# EAGLE board CT_schematic (EAGLE 7.6.0)

Size 100 x 80 mm. Coordinates in mm from the lower left corner, seen from the top.
Outline: 0,0 100,0 100,80 0,80 0,0
Copper layers (1*16): Top 0.035mm / dielectric 1.5mm / Bottom 0.035mm
Design rules "default": minimum track width 10mil, minimum drill 24mil, track to track 8mil, track to pad 8mil, pad to pad 8mil, via to via 8mil, smd to smd 8mil, copper to edge 40mil, drill to drill 8mil, minimum pad ring 10mil, minimum via ring 8mil, stop-mask expansion 4mil, vias tented up to drill 0mil, thermal gap 10mil

## Footprints (pad centres in the part's own frame; a part is rotated, then mirrored left to right if it is on the bottom)
C0603 = smd 0.8 x 0.8: 1 -0.762,0; 2 0.762,0
C0402 = smd 0.5 x 0.5: 1 -0.508,0; 2 0.508,0
C1210 = smd 1.2 x 2.5: 1 -1.524,0; 2 1.524,0
R0603 = smd 0.8 x 0.8: 1 -0.762,0; 2 0.762,0
EXV-9H = smd 3.505 x 1.676: 1 -2.857,0; 2 2.857,0
L0603 = smd 0.8 x 0.8: 1 -0.762,0; 2 0.762,0
IND25X25CZ = smd 2.489 x 3.429: 1 -2.718,0; 2 2.718,0
PJ-037B_PACKAGE = drill 3.7 square: 1 12,0 | drill 3.2 square: 2 6,0
LQFP100 = smd 0.3 x 1.2: 1 -6,-7.75; 2 -5.5,-7.75; 3 -5,-7.75; 4 -4.5,-7.75; 5 -4,-7.75; 6 -3.5,-7.75; 7 -3,-7.75; 8 -2.5,-7.75; 9 -2,-7.75; 10 -1.5,-7.75; 11 -1,-7.75; 12 -0.5,-7.75; 13 0,-7.75; 14 0.5,-7.75; 15 1,-7.75; 16 1.5,-7.75; 17 2,-7.75; 18 2.5,-7.75; 19 3,-7.75; 20 3.5,-7.75; 21 4,-7.75; 22 4.5,-7.75; 23 5,-7.75; 24 5.5,-7.75; 25 6,-7.75; 51 6,7.75; 52 5.5,7.75; 53 5,7.75; 54 4.5,7.75; 55 4,7.75; 56 3.5,7.75; 57 3,7.75; 58 2.5,7.75; 59 2,7.75; 60 1.5,7.75; 61 1,7.75; 62 0.5,7.75; 63 0,7.75; 64 -0.5,7.75; 65 -1,7.75; 66 -1.5,7.75; 67 -2,7.75; 68 -2.5,7.75; 69 -3,7.75; 70 -3.5,7.75; 71 -4,7.75; 72 -4.5,7.75; 73 -5,7.75; 74 -5.5,7.75; 75 -6,7.75 | smd 1.2 x 0.3: 26 7.75,-6; 27 7.75,-5.5; 28 7.75,-5; 29 7.75,-4.5; 30 7.75,-4; 31 7.75,-3.5; 32 7.75,-3; 33 7.75,-2.5; 34 7.75,-2; 35 7.75,-1.5; 36 7.75,-1; 37 7.75,-0.5; 38 7.75,0; 39 7.75,0.5; 40 7.75,1; 41 7.75,1.5; 42 7.75,2; 43 7.75,2.5; 44 7.75,3; 45 7.75,3.5; 46 7.75,4; 47 7.75,4.5; 48 7.75,5; 49 7.75,5.5; 50 7.75,6; 76 -7.75,6; 77 -7.75,5.5; 78 -7.75,5; 79 -7.75,4.5; 80 -7.75,4; 81 -7.75,3.5; 82 -7.75,3; 83 -7.75,2.5; 84 -7.75,2; 85 -7.75,1.5; 86 -7.75,1; 87 -7.75,0.5; 88 -7.75,0; 89 -7.75,-0.5; 90 -7.75,-1; 91 -7.75,-1.5; 92 -7.75,-2; 93 -7.75,-2.5; 94 -7.75,-3; 95 -7.75,-3.5; 96 -7.75,-4; 97 -7.75,-4.5; 98 -7.75,-5; 99 -7.75,-5.5; 100 -7.75,-6
TST-110-05-T-D-RA = drill 1 pad 1.7 square: 1 0,0 | drill 1 pad 1.7: 2 0,2.54; 3 2.54,0; 4 2.54,2.54; 5 5.08,0; 6 5.08,2.54; 7 7.62,0; 8 7.62,2.54; 9 10.16,0; 10 10.16,2.54; 11 12.7,0; 12 12.7,2.54; 13 15.24,0; 14 15.24,2.54; 15 17.78,0; 16 17.78,2.54; 17 20.32,0; 18 20.32,2.54; 19 22.86,0; 20 22.86,2.54
SON-8 = smd 0.35 x 0.85: 1 -0.975,-1.475; 2 -0.325,-1.475; 3 0.325,-1.475; 4 0.975,-1.475; 5 0.975,1.475; 6 0.325,1.475; 7 -0.325,1.475; 8 -0.975,1.475 | smd 2.4 x 1.65: PAD 0,0
RFM75-S = smd 0.85 x 1.6: 1 1.7,0.8; 2 2.97,0.8; 3 4.24,0.8; 4 5.51,0.8; 5 6.78,0.8; 6 8.05,0.8; 7 9.32,0.8; 8 10.59,0.8
FCI_10118193-0001LF = smd 0.4 x 1.35: 1 -1.3,2.675; 2 -0.65,2.675; 3 0,2.675; 4 0.65,2.675; 5 1.3,2.675 | smd 1.6 x 1.4: 6 -3.2,2.45; 7 3.2,2.45 | smd 1.9 x 1.9: 8 -1.2,0; 9 1.2,0 | hole 0.5: -3.3,0; 3.3,0
SOT143B = smd 1 x 0.7: 1 -0.75,-1 | smd 0.6 x 0.7: 2 0.95,-1; 3 0.95,1; 4 -0.95,1
ABS07-32.768KHZ-7-T = smd 1.1 x 2.4: 1 -2.5,0; 2 0,0
ABLS-25.000MHZ-B2F-T = smd 5.6 x 2.8: 1 -3.81,0; 2 5.69,0
ASEK = smd 1.4 x 1: 1 -1.1,-0.8; 2 1.1,-0.8; 3 1.1,0.8; 4 -1.1,0.8
IR3899MTR1PBF = smd 0.25 x 0.75: 1 0,0; 2 0.5,0; 3 1,0; 4 1.5,0; 5 2,0; 6 2.5,0; 7 3,0 | smd 0.75 x 0.25: 8 3.425,0.78; 9 3.425,1.28; 10 3.425,1.78; 14 -0.425,1.78; 15 -0.425,1.28; 16 -0.425,0.78 | smd 0.3 x 1.95: 11 3.22,3.63 | smd 1.62 x 2.42: 12 1.786,3.8 | smd 1 x 1.95: 13 0.117,3.63 | smd 2.19 x 1.25: 17 1.51,1.26
SON-6 = smd 0.55 x 0.3: 1 -0.355,0.5 | smd 0.52 x 0.3: 2 -0.37,0; 3 -0.37,-0.5; 4 0.37,-0.5; 5 0.37,0; 6 0.37,0.5
SW_4-1437565-2 = smd 1.4 x 2.1: 1 -2.23,4.55; 2 -2.23,-4.55; 3 2.23,4.55; 4 2.23,-4.55
LGM67K-G1J2-24-Z = smd 0.8 x 1.4: A -2,0; C 0,0
NC7SZ125M5X = smd 1.3 x 0.7: 1 -1.3,0.95; 2 -1.3,0; 3 -1.3,-0.95; 4 1.3,-0.95; 5 1.3,0.95

## Placement (x,y rotation side)
C1  1e-06  [C0603]  -31.75,71.12 0 top  (outside the outline)
C2  1e-07  [C0603]  -35.56,71.12 0 top  (outside the outline)
C3  1e-07  [C0603]  -39.37,71.12 0 top  (outside the outline)
C4  1e-07  [C0603]  -43.18,71.12 0 top  (outside the outline)
C5  1e-07  [C0603]  -46.99,71.12 0 top  (outside the outline)
C6  1e-07  [C0603]  -50.8,71.12 0 top  (outside the outline)
C7  1e-07  [C0603]  -54.61,71.12 0 top  (outside the outline)
C8  4.7e-06  [C0603]  -24.13,71.12 0 top  (outside the outline)
C9  1e-08  [C0603]  -58.42,71.12 0 top  (outside the outline)
C10  1e-06  [C0603]  -62.23,71.12 0 top  (outside the outline)
C11  1e-11  [C0402]  -41.91,76.2 0 top  (outside the outline)
C12  1e-11  [C0402]  -45.72,76.2 0 top  (outside the outline)
C13  1e-07  [C0402]  -49.53,76.2 0 top  (outside the outline)
C14  1e-07  [C0402]  -53.34,76.2 0 top  (outside the outline)
C15  1e-07  [C0402]  -57.15,76.2 0 top  (outside the outline)
C16  1e-07  [C0402]  -60.96,76.2 0 top  (outside the outline)
C17  1e-06  [C0603]  -66.04,71.12 0 top  (outside the outline)
C18  1e-08  [C0402]  -64.77,76.2 0 top  (outside the outline)
C19  0.0001  [C1210]  -52.07,54.61 0 top  (outside the outline)
C20  2.2e-06  [C0603]  -27.94,71.12 0 top  (outside the outline)
C21  1e-07  [C0402]  -68.58,76.2 0 top  (outside the outline)
C22  1e-07  [C0402]  -72.39,76.2 0 top  (outside the outline)
C23  8.6971073877236e-09  [R0603]  -20.32,60.96 0 top  (outside the outline)
C24  2.9649229730876e-07  [R0603]  -30.48,60.96 0 top  (outside the outline)
C27  1e-07  [C0402]  -15.24,81.28 0 top  (outside the outline)
C28  0.0001  [EXV-9H]  -17.78,46.99 0 top  (outside the outline)
C29  0.0001  [EXV-9H]  -29.21,46.99 0 top  (outside the outline)
C30  1e-08  [C0402]  -19.05,81.28 0 top  (outside the outline)
C31  1e-08  [C0402]  -22.86,81.28 0 top  (outside the outline)
F1  240.0  [L0603]  -69.85,71.12 0 top  (outside the outline)
I1  6.8e-07  [IND25X25CZ]  -59.69,46.99 0 top  (outside the outline)
J1  PJ-037B  [PJ-037B_PACKAGE]  -62.23,7.62 0 top  (outside the outline)
R2  1000.0  [R0603]  -15.24,76.2 0 top  (outside the outline)
R4  4700.0  [R0603]  -19.05,76.2 0 top  (outside the outline)
R5  2200.0  [R0603]  -22.86,76.2 0 top  (outside the outline)
R6  2200.0  [R0603]  -26.67,76.2 0 top  (outside the outline)
R7  10000.0  [R0603]  -15.24,66.04 0 top  (outside the outline)
R8  10000.0  [R0603]  -20.32,66.04 0 top  (outside the outline)
R9  10000.0  [R0603]  -25.4,66.04 0 top  (outside the outline)
R10  10000.0  [R0603]  -30.48,66.04 0 top  (outside the outline)
R11  10000.0  [R0603]  -35.56,66.04 0 top  (outside the outline)
R12  10000.0  [R0603]  -40.64,66.04 0 top  (outside the outline)
R13  10000.0  [R0603]  -45.72,66.04 0 top  (outside the outline)
R14  10000.0  [R0603]  -50.8,66.04 0 top  (outside the outline)
R15  10000.0  [R0603]  -55.88,66.04 0 top  (outside the outline)
R16  10000.0  [R0603]  -60.96,66.04 0 top  (outside the outline)
R17  0.1  [R0603]  -30.48,76.2 0 top  (outside the outline)
R18  4030.2416170974  [R0603]  -38.1,60.96 0 top  (outside the outline)
R19  719.68600305311  [R0603]  -45.72,60.96 0 top  (outside the outline)
R20  58.613333333333  [R0603]  -53.34,60.96 0 top  (outside the outline)
R21  130.0  [R0603]  -34.29,76.2 0 top  (outside the outline)
R22  39000.0  [R0603]  -66.04,66.04 0 top  (outside the outline)
R23  49900.0  [R0603]  -71.12,66.04 0 top  (outside the outline)
R24  5147.5789473684  [R0603]  -60.96,60.96 0 top  (outside the outline)
R25  10000.0  [R0603]  -15.24,71.12 0 top  (outside the outline)
R26  10000.0  [R0603]  -20.32,71.12 0 top  (outside the outline)
R27  9100.0  [R0603]  -38.1,76.2 0 top  (outside the outline)
R28  680000.0  [R0603]  -66.04,60.96 0 top  (outside the outline)
R29  120000.0  [R0603]  -71.12,60.96 0 top  (outside the outline)
U1  stm32f105v8t6  [LQFP100]  -38.1,8.89 0 top  (outside the outline)
U2  TST-110-05-T-D-RA  [TST-110-05-T-D-RA]  -46.99,36.83 0 top  (outside the outline)
U3  PCF85063TP/1Z  [SON-8]  -46.99,53.34 0 top  (outside the outline)
U4  RFM75-S  [RFM75-S]  -26.67,3.81 0 top  (outside the outline)
U5  10118193-0001LF  [FCI_10118193-0001LF]  -52.07,26.67 0 top  (outside the outline)
U6  prtr5v0u2ax  [SOT143B]  -35.56,81.28 0 top  (outside the outline)
U7  ABS07-32.768KHZ-7-T  [ABS07-32.768KHZ-7-T]  -27.94,54.61 0 top  (outside the outline)
U8  ABLS-25.000MHZ-B2F-T  [ABLS-25.000MHZ-B2F-T]  -48.26,46.99 0 top  (outside the outline)
U9  ASEK-32.768KHz-ECST  [ASEK]  -66.04,39.37 0 top  (outside the outline)
U10  IR3899MTR1PBF  [IR3899MTR1PBF]  -44.45,26.67 0 top  (outside the outline)
U11  TPS3895ADRYR  [SON-6]  -39.37,80.01 0 top  (outside the outline)
U12  4-1437565-2  [SW_4-1437565-2]  -27.94,29.21 0 top  (outside the outline)
U13  Q65110A2395  [LGM67K-G1J2-24-Z]  -36.83,54.61 0 top  (outside the outline)
U14  nc7sz125m5x  [NC7SZ125M5X]  -57.15,53.34 0 top  (outside the outline)
U15  nc7sz125m5x  [NC7SZ125M5X]  -63.5,53.34 0 top  (outside the outline)

## Library data of the parts
C1-C24 C27-C31 F1 I1 J1 R2 R4-R29 U1-U15 = circuit_tree

## Nets
CLK_CRYSTAL_U1_12: C11.1 U1.12 U8.1
CLK_CRYSTAL_U1_13: C12.1 U1.13 U8.2
CLK_CRYSTAL_U3_1: U3.1 U7.1
CLK_CRYSTAL_U3_2: U3.2 U7.2
CLK_U1_8: U1.8 U9.3
GND: C1.2 C2.2 C3.2 C4.2 C5.2 C6.2 C7.2 C8.2 C9.2 C10.2 C11.2 C12.2 C13.2 C14.2 C15.2 C16.2 C17.2 C18.2 C20.2 C21.2 C22.2 C27.2 C28.2 C29.2 C30.2 C31.2 J1.2 R2.2 R7.2 R13.2 R17.1 R17.2 R19.2 R22.2 R24.2 R27.2 R29.2 U1.10 U1.19 U1.20 U1.27 U1.49 U1.74 U1.99 U2.4 U2.6 U2.8 U2.10 U2.12 U2.14 U2.16 U2.18 U2.20 U3.4 U3.PAD U4.1 U5.5 U5.6 U5.7 U5.8 U5.9 U6.1 U9.2 U10.4 U10.11 U10.17 U11.2 U13.C U14.2 U14.3 U15.1 U15.3
NET_U1_14: R4.1 U1.14 U15.4
NET_U1_22: C9.1 C10.1 F1.1 U1.21 U1.22
NET_U1_92: R5.1 U1.92 U3.6
NET_U1_93: R6.1 U1.93 U3.5
NET_U1_94: R7.1 U1.94
NET_U1_97: U13.A
NET_U1_98: U12.3 U12.4
NET_U2_3: R8.1 U2.3
NET_U2_7: R10.1 U2.7
NET_U2_9: R11.1 U2.9
NET_U2_19: R13.1 U2.19
NET_U3_3: R14.1 U3.3
NET_U4_3: R15.1 U4.3
NET_U10_1: C23.1 R18.1 R19.1 R20.1 R21.1 U10.1 U10.8
NET_U10_2: C22.1 U10.2
NET_U10_3: C23.2 C24.1 C24.2 U10.3
NET_U10_5: R22.1 U10.5
NET_U10_10: C20.1 U10.10
NET_U10_12: C19.1 I1.1 U10.12
NET_U10_13: U10.13
NET_U10_14: C19.2 U10.14
NET_U10_15: R23.1 R24.1 U10.15
NET_U10_ATNET_3: I1.2 R18.2
NET_U10_ATNET_4: C24.2 R20.2
NET_U10_ATNET_5: R21.2
NET_U11_1: R26.1 R27.1 U11.1
NET_U11_3: R28.2 R29.1 U11.3
NET_U11_4: R25.1 U11.4 U14.4 U15.2
NET_U12_1: R2.1 U12.1 U12.2
PROC_SPI1_MISO: U1.31 U4.7
PROC_SPI1_MOSI: U1.32 U4.6
PROC_SPI1_NSS: R16.1 U1.29 U4.4
PROC_SPI1_SCK: U1.30 U4.5
PROC_SYS_JTDI: R9.1 U1.77 U2.5
PROC_SYS_JTDO: U1.89 U2.13
PROC_USB_OTG_FS_DM: U1.70 U5.2 U6.3
PROC_USB_OTG_FS_DP: U1.71 U5.3 U6.2
PROC_USB_OTG_FS_VBUS: U1.68 U5.1 U6.4
RST_OUT_U2_SRESET_B: R12.1 U2.15 U14.1
VCC_S1_16V8: C21.1 C28.1 C29.1 J1.1 R23.2 U10.9
VCC_TIER1_3V3: C1.1 C2.1 C3.1 C4.1 C5.1 C6.1 C7.1 C8.1 C13.1 C14.1 C15.1 C16.1 C17.1 C18.1 C27.1 C30.1 C31.1 F1.2 I1.2 R4.2 R5.2 R6.2 R8.2 R9.2 R10.2 R11.2 R12.2 R14.2 R15.2 R16.2 R18.2 R25.2 R26.2 R28.1 U1.6 U1.11 U1.28 U1.50 U1.75 U1.100 U2.1 U2.2 U3.8 U4.2 U9.4 U11.6 U14.5 U15.5

## Tracks (layer width: path | path; a pad name or v marks a point on that pad's centre or on a via)
CLK_CRYSTAL_U1_12  (2 unrouted)
CLK_CRYSTAL_U1_13  (2 unrouted)
CLK_CRYSTAL_U3_1  (1 unrouted)
CLK_CRYSTAL_U3_2  (1 unrouted)
CLK_U1_8  (1 unrouted)
GND  (71 unrouted)
NET_U1_14  (2 unrouted)
NET_U1_22  (4 unrouted)
NET_U1_92  (2 unrouted)
NET_U1_93  (2 unrouted)
NET_U1_94  (1 unrouted)
NET_U1_98  (1 unrouted)
NET_U2_3  (1 unrouted)
NET_U2_7  (1 unrouted)
NET_U2_9  (1 unrouted)
NET_U2_19  (1 unrouted)
NET_U3_3  (1 unrouted)
NET_U4_3  (1 unrouted)
NET_U10_1  (6 unrouted)
NET_U10_2  (1 unrouted)
NET_U10_3  (3 unrouted)
NET_U10_5  (1 unrouted)
NET_U10_10  (1 unrouted)
NET_U10_12  (2 unrouted)
NET_U10_14  (1 unrouted)
NET_U10_15  (2 unrouted)
NET_U10_ATNET_3  (1 unrouted)
NET_U10_ATNET_4  (1 unrouted)
NET_U11_1  (2 unrouted)
NET_U11_3  (2 unrouted)
NET_U11_4  (3 unrouted)
NET_U12_1  (2 unrouted)
PROC_SPI1_MISO  (1 unrouted)
PROC_SPI1_MOSI  (1 unrouted)
PROC_SPI1_NSS  (2 unrouted)
PROC_SPI1_SCK  (1 unrouted)
PROC_SYS_JTDI  (2 unrouted)
PROC_SYS_JTDO  (1 unrouted)
PROC_USB_OTG_FS_DM  (2 unrouted)
PROC_USB_OTG_FS_DP  (2 unrouted)
PROC_USB_OTG_FS_VBUS  (2 unrouted)
RST_OUT_U2_SRESET_B  (2 unrouted)
VCC_S1_16V8  (5 unrouted)
VCC_TIER1_3V3  (47 unrouted)